# EAGLE board 4brar07_ESP8266 (EAGLE 9.6.2)
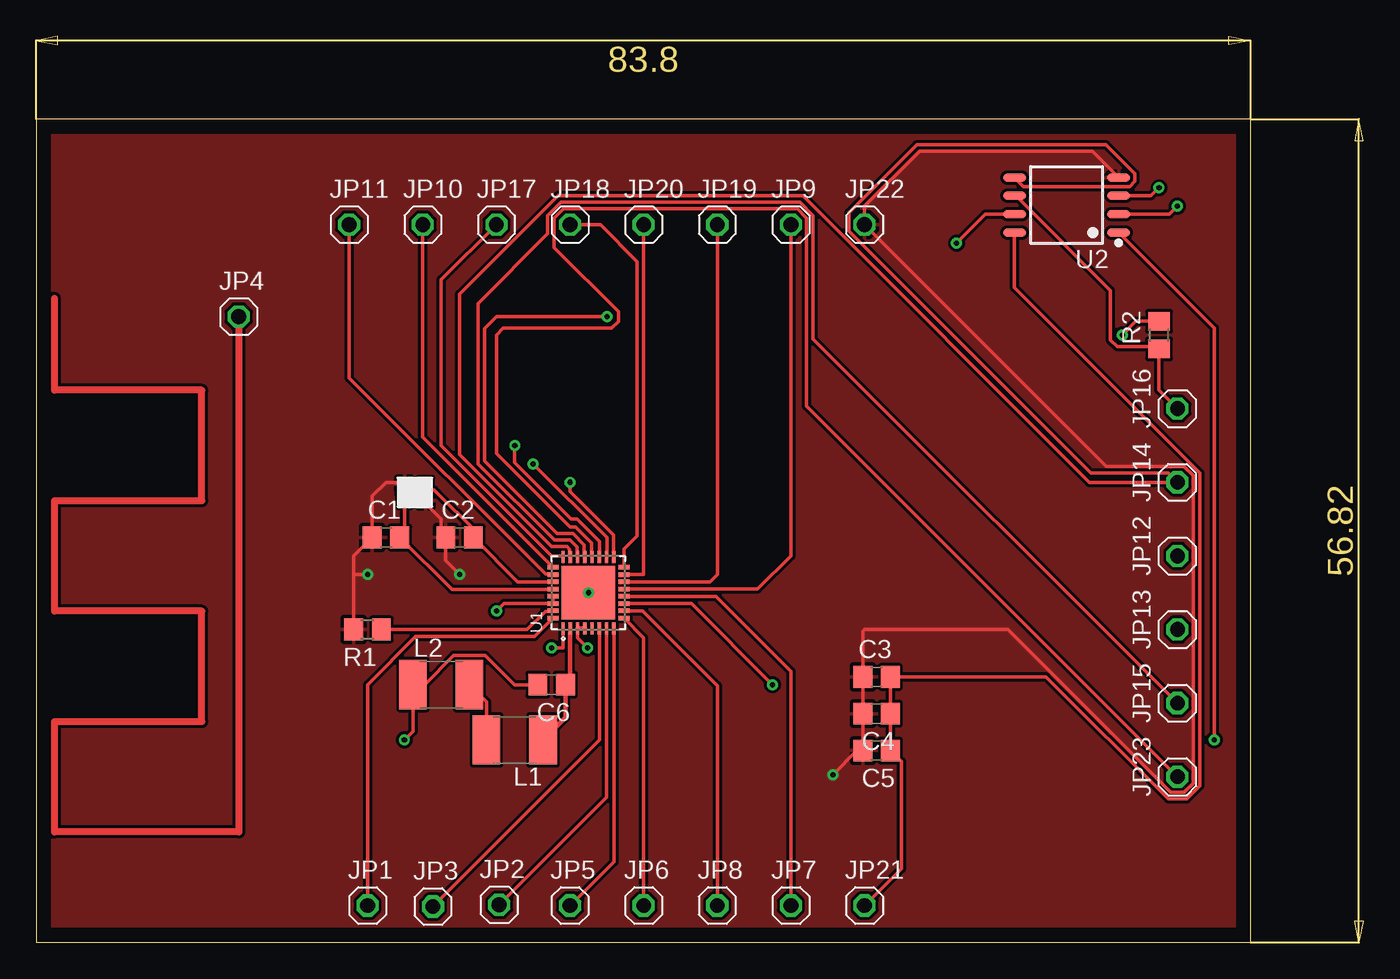
[diagram p0: board, top side]
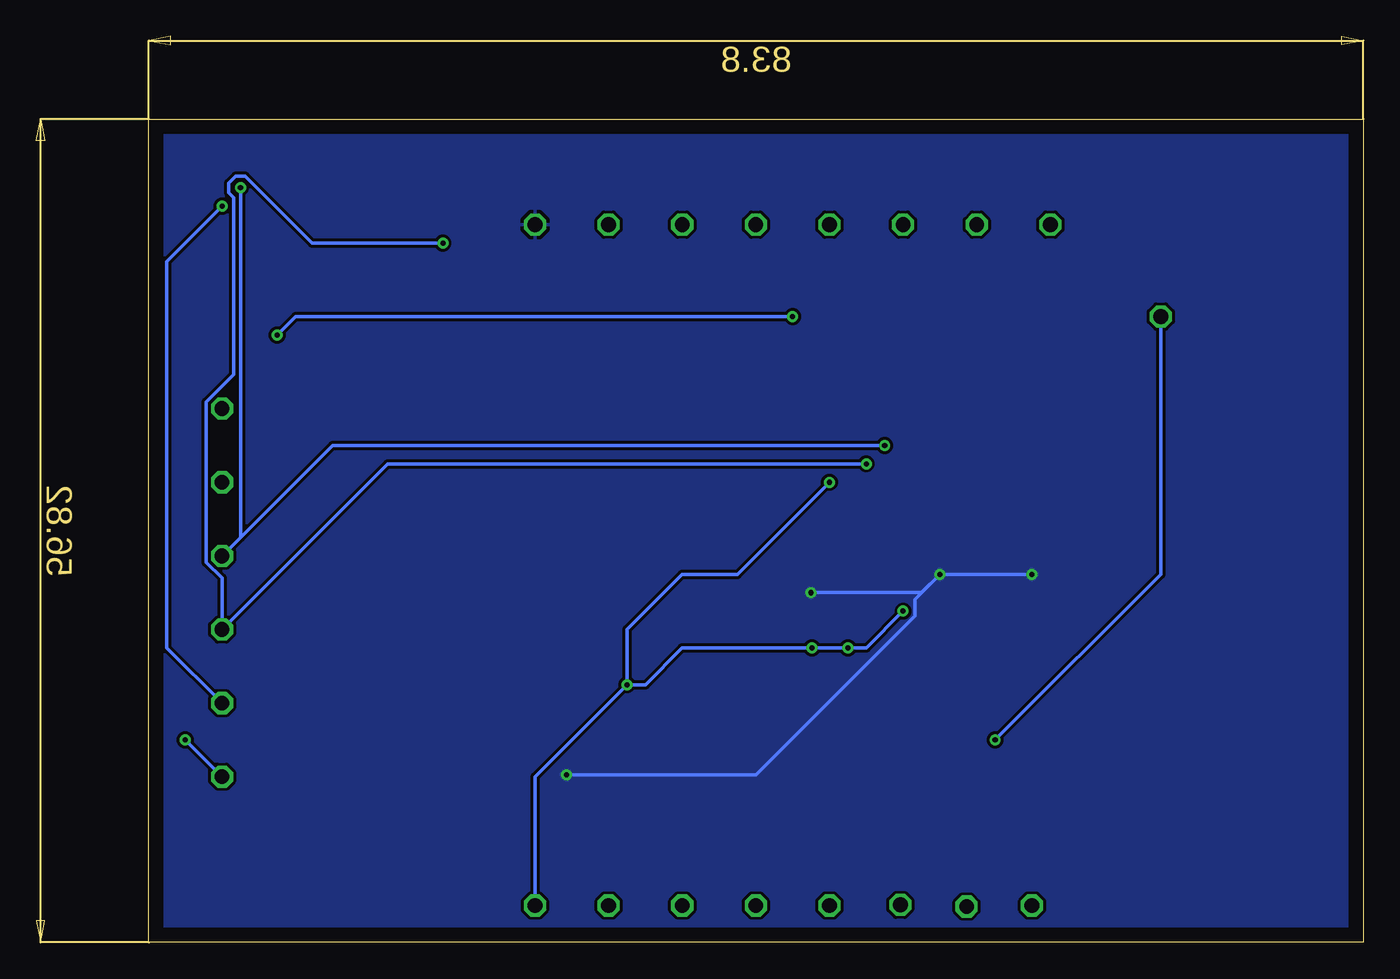
[diagram p1: board, bottom side, seen from below]

Size 83.8 x 56.82 mm. Coordinates in mm from the lower left corner, seen from the top.
Outline: 0,0 83.8,0 83.8,56.82 0,56.82 0,0
Copper layers (1*16): Top 0.035mm / dielectric 1.5mm / Bottom 0.035mm
Design rules "default *": minimum track width 6mil, minimum drill 0.25mm, track to track 0.2mm, track to pad 0.2mm, pad to pad 0.2mm, via to via 0.3mm, smd to smd 0.2mm, copper to edge 40mil, drill to drill 6mil, minimum pad ring 10mil, minimum via ring 8mil, stop-mask expansion 4mil, vias tented up to drill 0mil, thermal gap 10mil
Net classes: 0 default: width 0.25 mm; 1 power: width 0.25 mm; 2 antenna: width 0.25 mm

## Footprints (pad centres in the part's own frame; a part is rotated, then mirrored left to right if it is on the bottom)
C0805 = smd 1.3 x 1.5: 1 -0.95,0; 2 0.95,0
1X01 = drill 1.016 octagon: 1 0,0
L1812 = smd 1.9 x 3.4: 1 -1.95,0; 2 1.95,0
R0805 = smd 1.3 x 1.5: 1 -0.95,0; 2 0.95,0
QFN50P500X500X80-33N = smd 0.8 x 0.27: 1 -2.45,1.75; 2 -2.45,1.25; 3 -2.45,0.75; 4 -2.45,0.25; 5 -2.45,-0.25; 6 -2.45,-0.75; 7 -2.45,-1.25; 8 -2.45,-1.75; 17 2.45,-1.75; 18 2.45,-1.25; 19 2.45,-0.75; 20 2.45,-0.25; 21 2.45,0.25; 22 2.45,0.75; 23 2.45,1.25; 24 2.45,1.75 | smd 0.27 x 0.8: 9 -1.75,-2.45; 10 -1.25,-2.45; 11 -0.75,-2.45; 12 -0.25,-2.45; 13 0.25,-2.45; 14 0.75,-2.45; 15 1.25,-2.45; 16 1.75,-2.45; 25 1.75,2.45; 26 1.25,2.45; 27 0.75,2.45; 28 0.25,2.45; 29 -0.25,2.45; 30 -0.75,2.45; 31 -1.25,2.45; 32 -1.75,2.45 | smd 3.7 x 3.7: 33 0,0
SOIC127P790X216-8N = smd 1.6 x 0.6: 1 -3.6,1.905; 2 -3.6,0.635; 3 -3.6,-0.635; 4 -3.6,-1.905; 5 3.6,-1.905; 6 3.6,-0.635; 7 3.6,0.635; 8 3.6,1.905
OSCILLATOR = smd 0.95 x 0.85: P$1 0,0; P$2 1.45,0; P$3 1.45,1.15; P$4 0,1.15

## Placement (x,y rotation side)
C1  [C0805]  24.13,27.94 0 top
C2  [C0805]  29.21,27.94 0 top
C3  [C0805]  57.98,18.32 0 top
C4  [C0805]  57.98,15.78 180 top
C5  [C0805]  57.98,13.24 180 top
C6  [C0805]  35.56,17.78 180 top
JP1  [1X01]  22.86,2.54 0 top
JP2  [1X01]  31.94,2.59 0 top
JP3  [1X01]  27.37,2.48 0 top
JP4  [1X01]  13.97,43.18 0 top
JP5  [1X01]  36.83,2.54 0 top
JP6  [1X01]  41.91,2.54 0 top
JP7  [1X01]  52.07,2.54 0 top
JP8  [1X01]  46.99,2.54 0 top
JP9  [1X01]  52.07,49.53 0 top
JP10  [1X01]  26.67,49.53 0 top
JP11  [1X01]  21.59,49.53 0 top
JP12  [1X01]  78.74,26.67 90 top
JP13  [1X01]  78.74,21.59 90 top
JP14  [1X01]  78.74,31.75 90 top
JP15  [1X01]  78.74,16.51 90 top
JP16  [1X01]  78.74,36.83 90 top
JP17  [1X01]  31.75,49.53 0 top
JP18  [1X01]  36.83,49.53 0 top
JP19  [1X01]  46.99,49.53 0 top
JP20  [1X01]  41.91,49.53 0 top
JP21  [1X01]  57.15,2.54 0 top
JP22  [1X01]  57.15,49.53 0 top
JP23  [1X01]  78.74,11.43 90 top
L1  [L1812]  33.02,13.97 180 top
L2  [L1812]  27.94,17.78 0 top
R1  [R0805]  22.86,21.59 180 top
R2  [R0805]  77.47,41.91 90 top
U1  ESP8266EX  [QFN50P500X500X80-33N]  38.1,24.13 90 top
U2  W25Q32JVSSIQ  [SOIC127P790X216-8N]  71.09,50.88 180 top
U3  Q22FA12800332  [OSCILLATOR]  25.4,30.48 0 top

## Library data of the parts
C1-C6 = rcl; SPICEPREFIX: C
JP1-JP23 = pinhead
L1 L2 = rcl; SPICEPREFIX: L
R1 R2 = rcl; SPICEPREFIX: R
U1 = ESP8266EX; AVAILABILITY: In Stock; CHECK_PRICES: https://www.snapeda.com/parts/ESP8266EX/Espressif+Systems/view-part/?ref=eda; DESCRIPTION: IC RF TxRx + MCU WiFi 802.11b/g/n 2.4GHz 32-VFQFN Exposed Pad; MF: Espressif Systems; MP: ESP8266EX; PACKAGE: VFQFN-32 Espressif Systems; PRICE: None; SNAPEDA_LINK: https://www.snapeda.com/parts/ESP8266EX/Espressif+Systems/view-part/?ref=snap
U2 = W25Q32JVSSIQ; AVAILABILITY: In Stock; CHECK_PRICES: https://www.snapeda.com/parts/W25Q32JVSSIQ/Winbond/view-part/?ref=eda; DESCRIPTION: FLASH - NOR Memory IC 32Mb (4M x 8) SPI - Quad I/O 133 MHz 8-SOIC; MF: Winbond; MP: W25Q32JVSSIQ; PACKAGE: SOIC-8 Winbond; PRICE: None; SNAPEDA_LINK: https://www.snapeda.com/parts/W25Q32JVSSIQ/Winbond/view-part/?ref=snap
U3 = Q22FA12800332; U3: U3

## Nets
ADC_IN: JP3.1 U1.6
ANT1 [antenna]: C6.2 JP4.1 L2.1
CHIP_ENABLE: JP2.1 U1.7
GND [power]: C1.1 C2.1 C3.1 C4.2 C5.2 JP22.1 R1.2 U1.33 U2.4 U3.P$2 U3.P$4
GPIO0: JP20.1 U1.15
GPIO2: JP19.1 U1.14
GPIO4: JP18.1 U1.16
GPIO5: JP17.1 U1.24
GPIO12: JP8.1 U1.10
GPIO13: JP7.1 U1.12
GPIO14: JP6.1 U1.9
GPIO15: JP9.1 U1.13
GPIO16: JP5.1 U1.8
N$1: C1.2 U1.28 U3.P$1
N$2: C2.2 U1.27 U3.P$3
N$7: C6.1 L1.1 U1.2
N$21: R1.1 U1.31
N$26: R2.2 U1.21
N$28: L1.2 L2.2
RST: JP1.1 U1.32
SD_CLK: JP16.1 R2.1 U2.6
SD_CMD: JP23.1 U1.20 U2.1
SD_D0: JP15.1 U1.22 U2.2
SD_D1: JP14.1 U1.23 U2.5
SD_D2: JP13.1 U1.18 U2.7
SD_D3: JP12.1 U1.19 U2.3
URXD: JP10.1 U1.25
UTXD: JP11.1 U1.26
VDD33 [power]: C3.2 C4.1 C5.1 JP21.1 U1.1 U1.3 U1.4 U1.11 U1.17 U1.29 U1.30 U2.8
VDD_RTC: U1.5

## Tracks (layer width: path | path; a pad name or v marks a point on that pad's centre or on a via)
ADC_IN
  Top 0.25: U1.6 38.85,13.96 JP3.1
ANT1  (via drill 0.35)
  Top 0.25: C6.2 33,17.78 30.98,19.8 28.8,19.8 26.78,17.78 L2.1 25.99,14.56 v25.4,13.97
  Top 0.5: JP4.1 13.97,7.62 1.27,7.62 1.27,15.24 11.43,15.24 11.43,22.86 1.27,22.86 1.27,30.48 11.43,30.48 11.43,38.1 1.27,38.1 1.27,44.45
  Bottom 0.25: JP4.1 13.97,25.4 v25.4,13.97
CHIP_ENABLE
  Top 0.25: U1.7 39.35,10 JP2.1
GND  (via drill 0.35)
  Top 0.25: U3.P$2 26.85,30.3 27.94,29.21 27.94,27.94 C2.1 28.26,26.35 v29.21,25.4 | U3.P$4 25.28,31.75 24.13,31.75 23.18,30.8 C1.1 21.91,26.67 21.91,25.4 | 21.91,25.4 R1.2 | U2.4 72.86,54.61 60.96,54.61 57.15,50.8 JP22.1 73.84,32.84 79.19,32.84 79.83,32.2 79.83,10.98 79.19,10.34 78.29,10.34 67.04,21.59 57.15,21.59 57.03,21.47 C3.1 C4.2 C5.2 56.64,13.24 v54.96,11.56 | v22.86,25.4 21.91,25.4
  Bottom 0.25: v29.21,25.4 v22.86,25.4 | v29.21,25.4 30.95,23.66 30.95,22.53 41.91,11.56 v54.96,11.56 | U1.33 30.48,24.13 v29.21,25.4
  other vias: 38.1,24.13
  pour Top: -0.04,-0.04 83.76,-0.04 83.76,56.78 -0.04,56.78
  pour Bottom: -0.04,-0.04 83.76,-0.04 83.76,56.78 -0.04,56.78
GPIO0
  Top 0.25: U1.15 40.57,25.4 41.91,25.4 JP20.1
GPIO2
  Top 0.25: U1.14 46.47,24.88 46.99,25.4 JP19.1
GPIO4
  Top 0.25: U1.16 40.55,27.15 41.46,28.06 41.46,46.99 38.92,49.53 JP18.1
GPIO5
  Top 0.25: U1.24 36.26,26.67 35.56,26.67 27.94,34.29 27.94,45.72 JP17.1
GPIO12
  Top 0.25: U1.10 41.82,22.88 46.99,17.71 JP8.1
GPIO13
  Top 0.25: U1.12 46.9,23.88 52.07,18.71 JP7.1
GPIO14
  Top 0.25: U1.9 41.91,21.02 JP6.1
GPIO15
  Top 0.25: U1.13 49.78,24.38 52.07,26.67 JP9.1
GPIO16
  Top 0.25: U1.8 39.85,5.56 JP5.1
N$1
  Top 0.25: U3.P$1 25.4,28.26 C1.2 28.68,24.34 35.61,24.34 U1.28
N$2
  Top 0.25: U1.27 33.22,24.88 C2.2 30.48,27.94 30.48,28.21 27.46,31.23 27.25,31.23 U3.P$3
N$7
  Top 0.25: 36.84,21.35 36.84,21.68 U1.2
  Top 0.3: L1.1 36.51,15.51 C6.1 36.84,18.11 36.84,21.35
N$21
  Top 0.25: U1.31 35.61,22.84 35.13,22.84 33.88,21.59 R1.1
N$26  (via drill 0.35)
  Top 0.25: v74.93,41.91 75.88,42.86 R2.2 | U1.21 37.85,26.67 37.81,26.71 37.81,27.43 37.03,28.21 35.93,28.21 30.93,33.21 30.93,42.36 31.75,43.18 v39.37,43.18
  Bottom 0.25: v39.37,43.18 73.66,43.18 v74.93,41.91
N$28
  Top 0.25: L2.2 31.07,16.6 L1.2
RST
  Top 0.25: JP1.1 22.86,17.78 26.19,21.11 34.38,21.11 U1.32
SD_CLK
  Top 0.25: JP16.1 77.47,38.1 R2.1 77.32,41.11 74.6,41.11 74.13,41.58 74.13,44.99 67.6,51.52 U2.6
SD_CMD  (via drill 0.35)
  Top 0.25: JP23.1 53.16,37.01 53.16,49.98 52.52,50.62 36.38,50.62 35.74,49.98 35.74,47.94 40.17,43.51 40.17,42.85 39.7,42.38 32.22,42.38 31.75,41.91 31.75,33.73 36.83,28.66 37.22,28.66 38.31,27.56 38.31,26.62 U1.20 | U2.1 81.28,42.38 v81.28,13.97
  Bottom 0.25: v81.28,13.97 JP23.1
SD_D0  (via drill 0.35)
  Top 0.25: JP15.1 53.61,41.64 53.61,50.17 52.71,51.07 36.19,51.07 35.29,50.17 35.29,48.89 30.48,44.08 30.48,33.02 35.75,27.76 36.84,27.76 37.31,27.29 37.31,26.62 U1.22 | U2.2 78.18,50.24 v78.74,50.8
  Bottom 0.25: v78.74,50.8 82.55,46.99 82.55,20.32 JP15.1
SD_D1
  Top 0.25: U1.23 36.81,26.62 36.81,27.1 36.61,27.3 35.56,27.3 29.21,33.66 29.21,44.72 36.01,51.52 52.89,51.52 72.66,31.75 JP14.1 78.1,32.39 72.76,32.39 56.06,49.08 56.06,50.35 60.77,55.06 73.8,55.06 75.81,53.04 75.81,52.53 75.45,52.16 68.11,52.16 U2.5
SD_D2  (via drill 0.35)
  Top 0.25: U1.18 39.37,26.6 39.37,27.94 v34.29,33.02 | v63.5,48.26 65.48,50.24 U2.7
  Bottom 0.25: v34.29,33.02 67.31,33.02 JP13.1 78.74,25.13 79.83,26.22 79.83,37.28 77.94,39.17 77.94,51.4 78.27,51.74 78.27,52.4 77.8,52.87 77.14,52.87 72.52,48.26 v63.5,48.26
SD_D3  (via drill 0.35)
  Top 0.25: U1.19 38.85,27.66 37.3,29.21 36.91,29.21 33.02,33.1 v33.02,34.29 | v77.47,52.07 76.91,51.52 U2.3
  Bottom 0.25: v33.02,34.29 71.12,34.29 JP12.1 77.47,27.94 v77.47,52.07
URXD
  Top 0.25: U1.25 26.67,34.86 JP10.1
UTXD
  Top 0.25: U1.26 35.61,25.42 35.13,25.42 21.59,38.96 JP11.1
VDD33  (via drill 0.35)
  Top 0.25: JP21.1 59.69,5.08 59.69,12.48 C5.1 C4.1 C3.2 69.68,18.32 78.1,9.89 79.38,9.89 80.28,10.79 80.28,32.39 67.49,45.17 U2.8 | U1.11 45.2,23.38 v50.8,17.78 | U1.29 U1.30 32.27,23.38 v31.75,22.86 | v35.56,20.32 36.36,20.32 U1.1 | v38.05,20.32 37.35,21.02 U1.3 | U1.17 39.85,26.67 39.82,26.7 39.82,28.13 36.83,31.12 v36.83,31.75
  Top 0.3: U1.4 U1.3
  Bottom 0.25: v50.8,17.78 57.15,11.43 JP21.1 | v31.75,22.86 34.29,20.32 v35.56,20.32 v38.05,20.32 46.99,20.32 49.53,17.78 v50.8,17.78 | v50.8,17.78 50.8,21.59 46.99,25.4 43.18,25.4 v36.83,31.75